# Altium PCB TIDA-PowerNBIoT_PCB.PcbDoc (part 2 of 3)
Units mil, origin at the board's own origin, x right, y up, seen from the top; angles counter-clockwise.
Board outline 2500 x 2750 mil, 2 copper layers (Top Layer, Bottom Layer), stack 38.548 mil thick; 82 components, 48 nets, 212 pads, 48 vias.
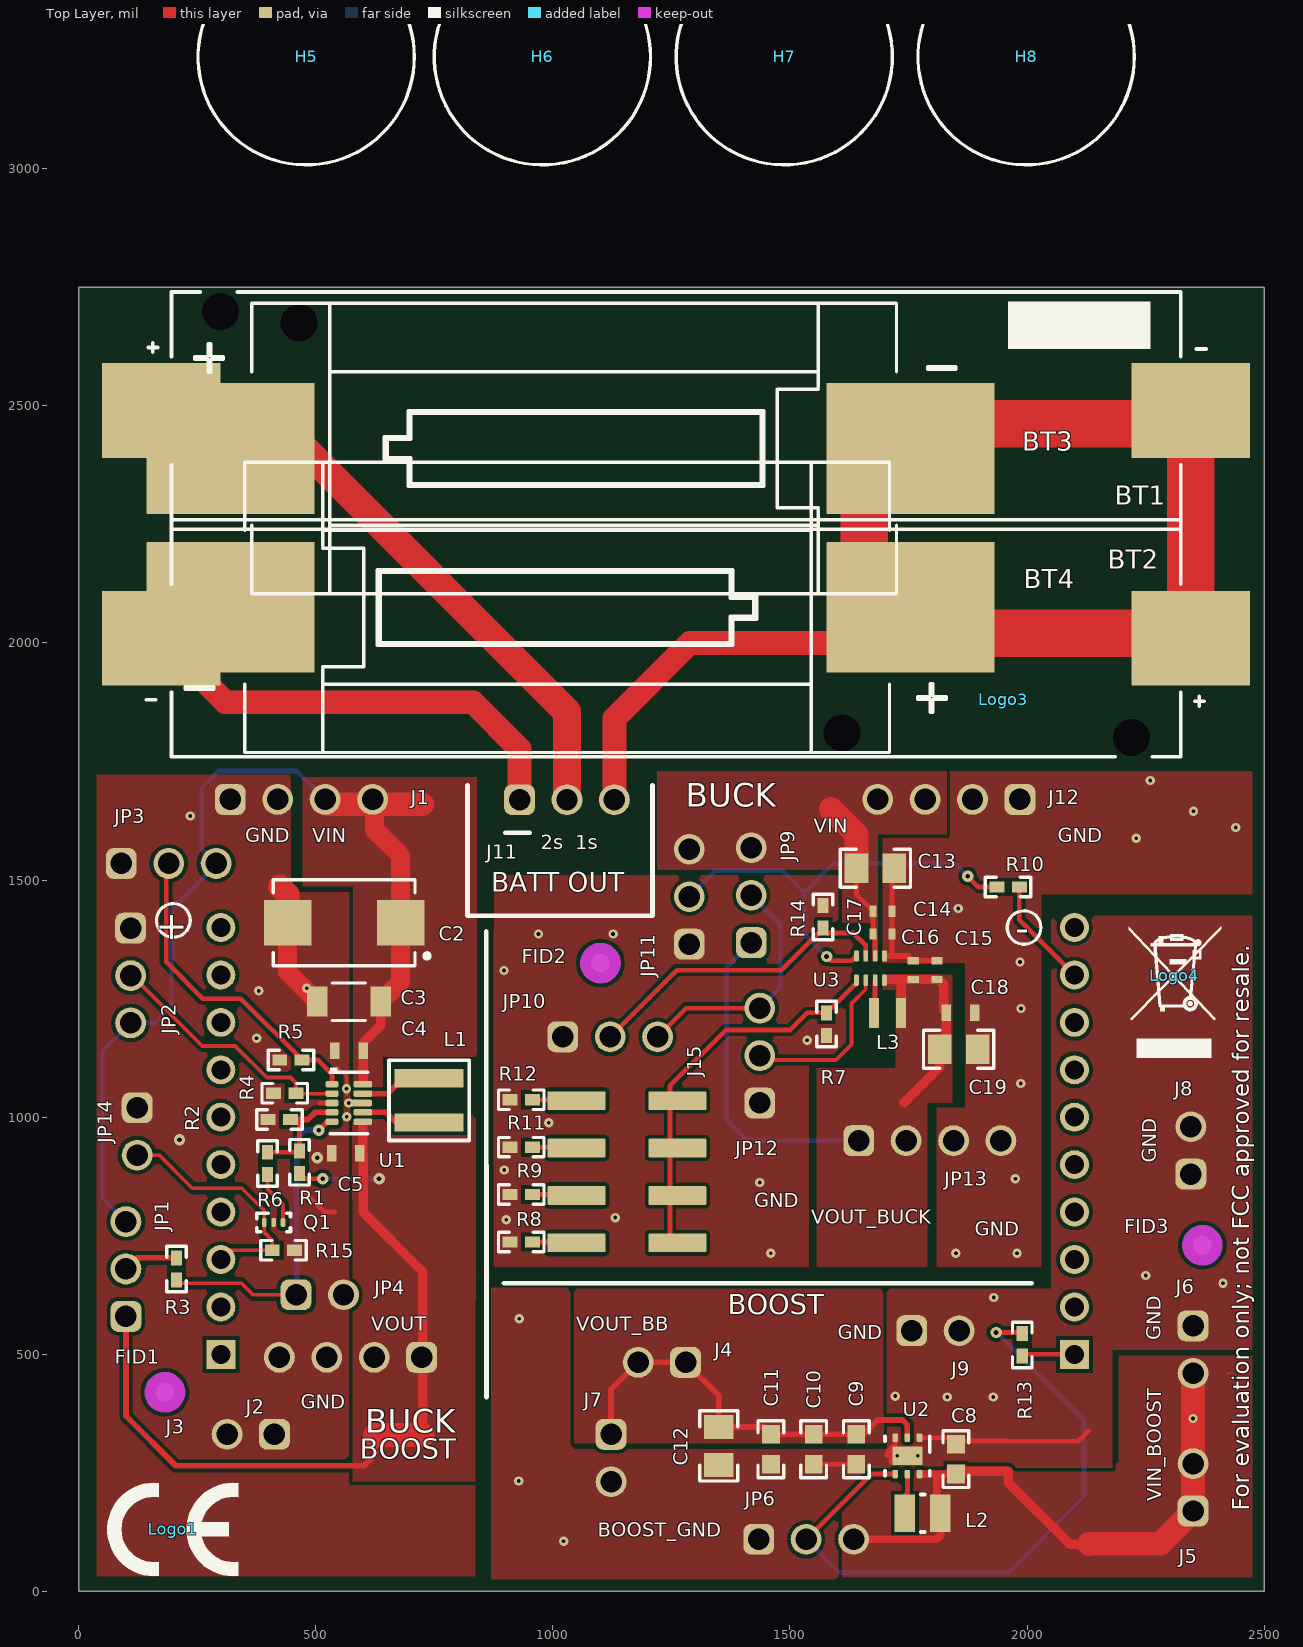
[diagram p0: Top Layer view]

## Via types
v1: diameter 19.68, hole 7.87, Top Layer to Bottom Layer, tented top, 38 vias
v2: diameter 24, hole 10, Top Layer to Bottom Layer, tented top, 8 vias
v3: diameter 19.68, hole 7.87, Top Layer to Bottom Layer, 2 vias

## Nets (pads, with @x,y where several pads share a name; then routed paths per layer and width w, separated by ;. In a path a pad name is that pad's centre, name@x,y a point inside that pad or via, vN(x,y) a via of type N, cw(c..) or ccw(c..) an arc to the next point about the centre after c; other vN are vias at no path point) (continued)
BAT1: (continued)
  Top Layer w100: BT2.1@2345.43,2010 2336,2010 BT2.1@2326,2020 ; BT2.1@2326,2020 1656.93,2020 1656.93,2457.44 1661.93,2462.44 2317.87,2462.44 BT1.2@2345.43,2490 2345.43,2039.43 BT2.1@2326,2020
BAT2: BT1.1 BT3.1 J11.2 | length 1304
  Top Layer w60: BT1.1@174.57,2490 239.57,2425 460,2425 1030,1855 J11.2@1030,1669.41
BATT_GND: BT2.2 BT4.2 J11.1 | length 959.4
  Top Layer w50: BT2.2@174.57,2010 309.57,1875 831.71,1875 930,1776.71 J11.1@930,1669.41
BOOST_GND: C8.2 C9.2 C10.2 C11.2 C12.2 J6.1 J7.2 J8.1 J8.2 J9.1 J9.2 JP6.1 U2.1 U2.3 U2.7@1747.72,286 | length 537
  Top Layer w10: C10.2@1550,268.5 1635.34,268.5 C9.2@1643.34,276.51 ; 1704.64,286.78 1706.22,288.36 1706.22,294.22 1717.84,305.84 1722.13,305.84 U2.3@1722.13,324.39 ; 1712.94,295 1713.22,272.95 ; U2.7@1745.91,286 U2.7@1747.72,286 ; U2.1@1773.31,324.39 1835.61,324.39 1842.5,317.5 1959.2,317.5 1960,316.69 2107.6,316.69 2130,339.09
  other v1: 1022.81,105.67 928.25,232.85 1831.46,410 1928.84,410 1722.13,411.95 929.5,575 1929.78,620 2413.19,650 2250,666.36
  other v3: 1726.06,286 1769.37,286
BQ_ALERT: J16.7